# Altium PCB Flow_Pump显示板.PcbDoc
Units mil, origin at the board's own origin, x right, y up, seen from the top; angles counter-clockwise.
Board outline 3740.47 x 3740.47 mil, 2 copper layers (Top Layer, Bottom Layer); 39 components, 34 nets, 136 pads, 147 vias.
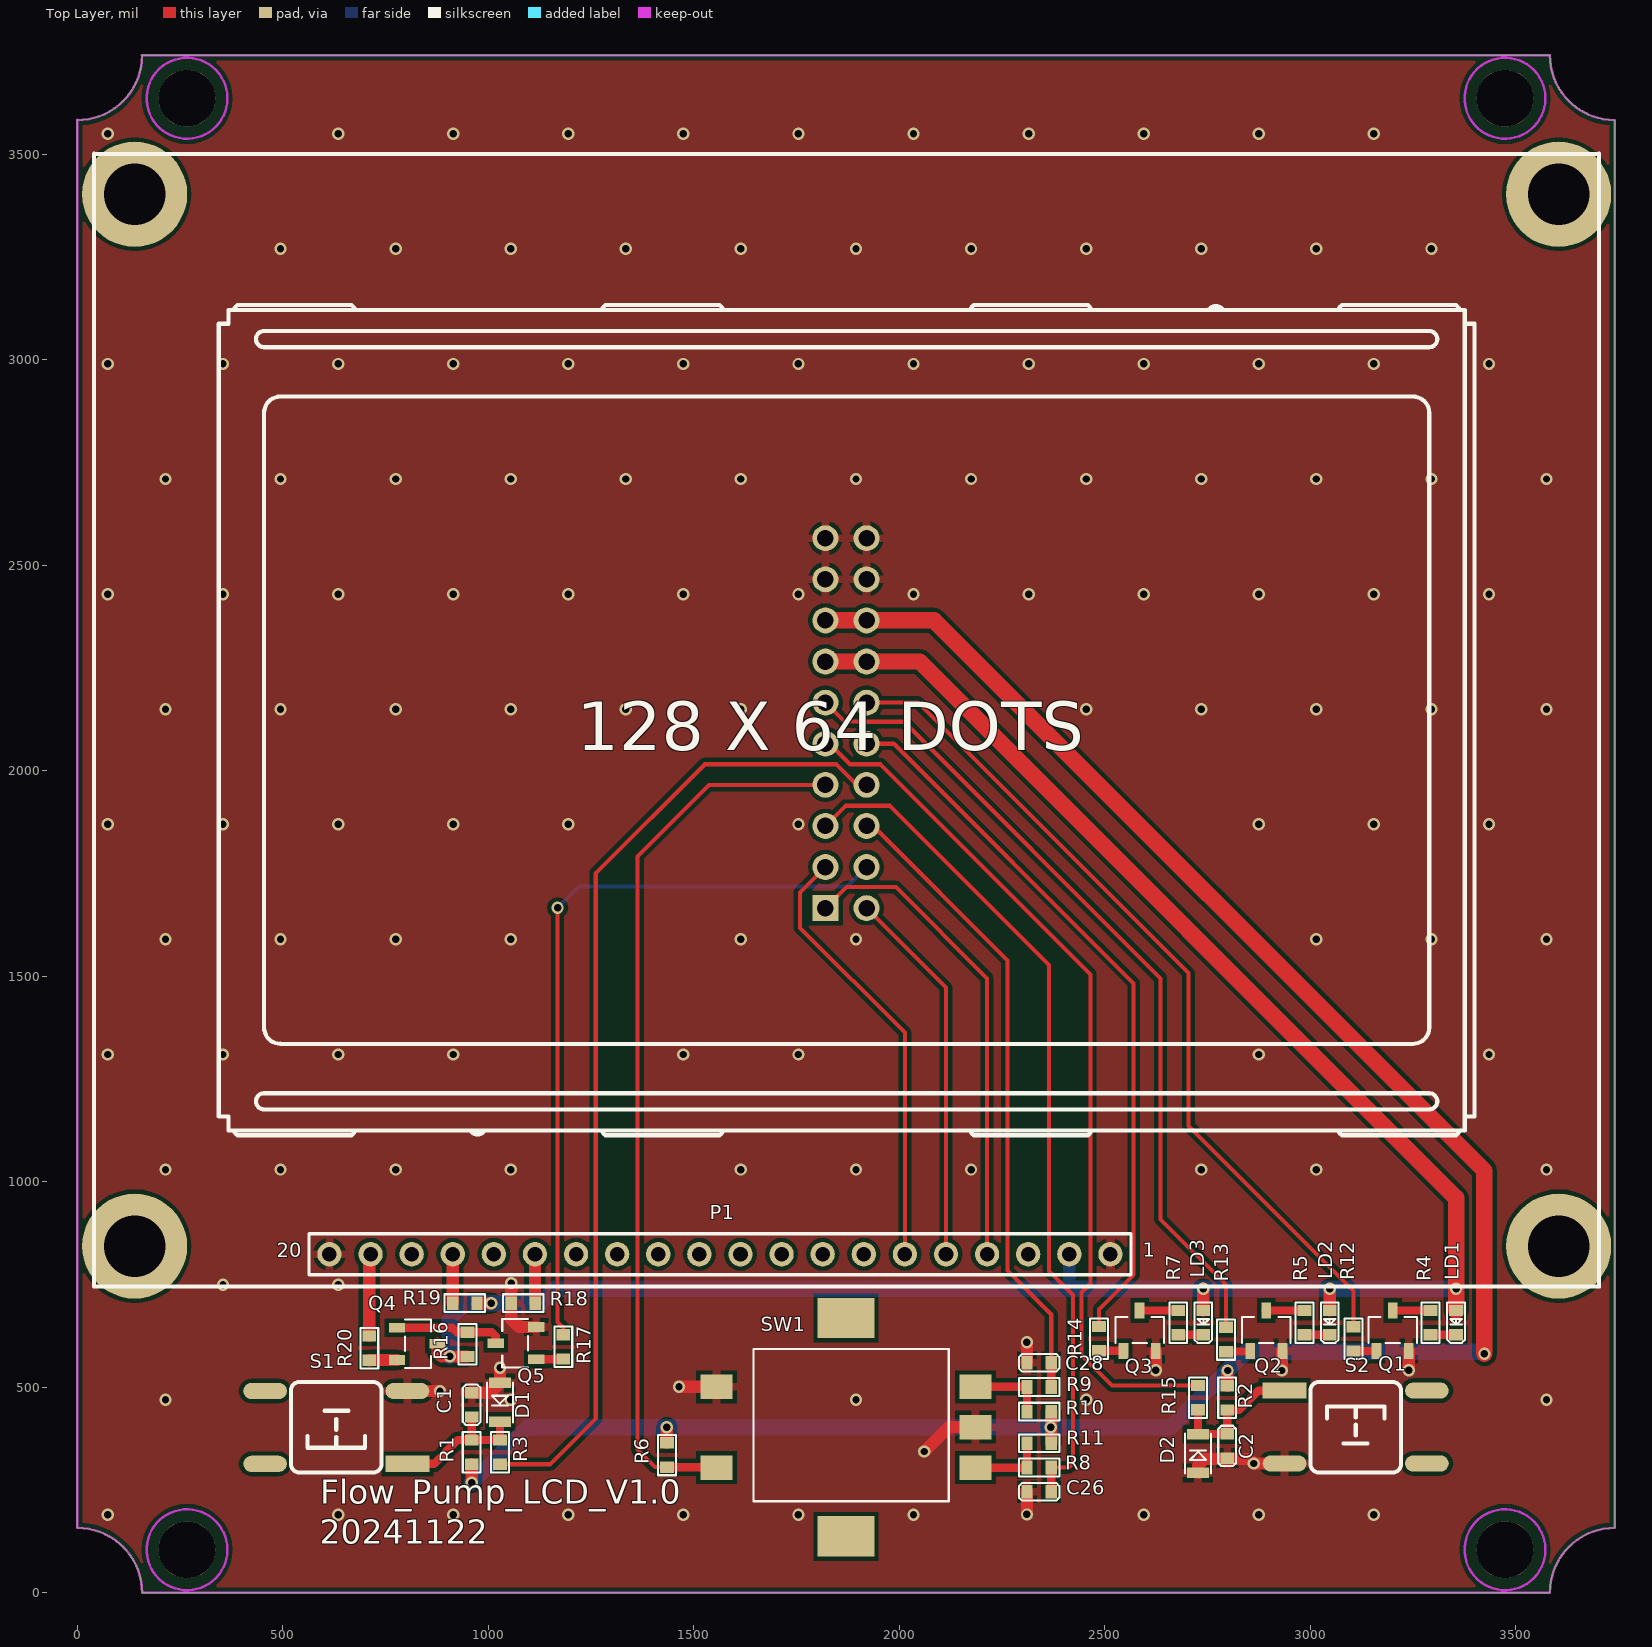
[diagram p0: Top Layer view]
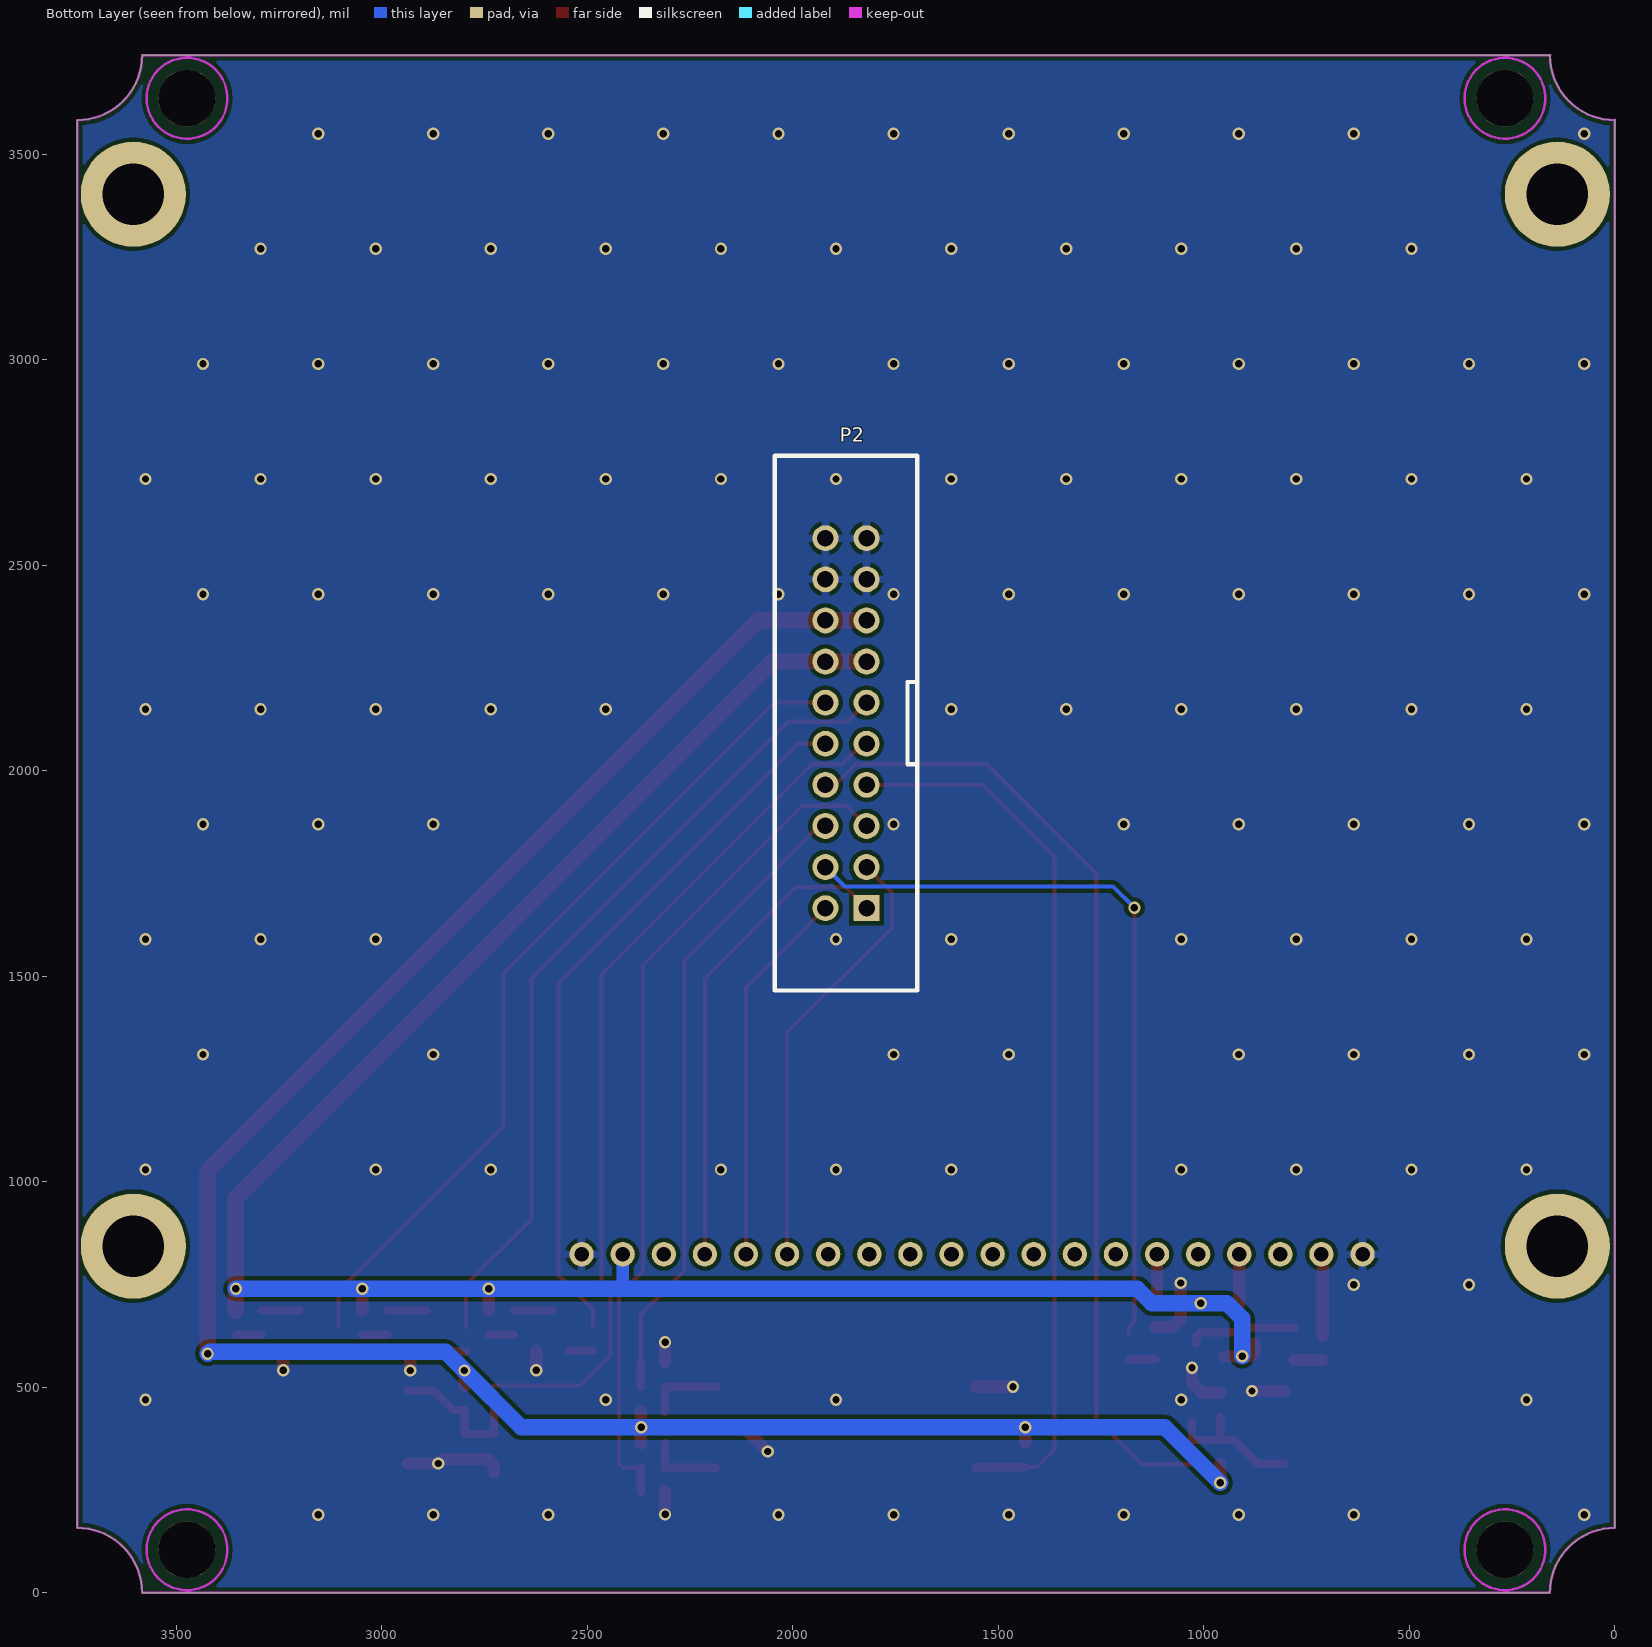
[diagram p1: Bottom Layer view, seen from below]

## Layer stack, top to bottom
Top Solder: solder mask 0.4, Solder Resist, Dk 3.5
Top Layer: signal copper 1.4
Dielectric 1: dielectric 12.6, FR-4, Dk 4.8
Bottom Layer: signal copper 1.4
Bottom Solder: solder mask 0.4, Solder Resist, Dk 3.5

## Board outline
0,157.32 0,3583.16 -0.16,3582.52 ccw(c-0.16,3740) 157.32,3740 157,3740.16 3582.68,3740.16 3582.52,3740.32 ccw(c3740,3740.32) 3740,3582.83 3740,157.64 3740.32,157.64 ccw(c3740.32,0.16) 3582.83,0.16 3582.83,0 157.64,0 157.64,-0.16 ccw(c0.16,-0.16)

## Design rules (kind name [scope] priority, off if disabled: settings)
Clearance [All] p1: gap=10
HoleSize [All] p1: absolutevalues=TRUE maxlimit=200 minlimit=1 maxpercent=80.000 minpercent=20.000
PolygonConnect PolygonConnect_1 [IsVia] p1: connectstyle=Direct reliefconductorwidth=10 reliefentries=4 polygonreliefangle="90 Angle" airgapwidth=10
PolygonConnect [All] p2: connectstyle=Relief reliefconductorwidth=20 reliefentries=4 polygonreliefangle="90 Angle" airgapwidth=10
RoutingVias [All] p1: holewidth=28 width=50 viastyle="Through Hole" minholewidth=28 minwidth=50 maxholewidth=28 maxwidth=50
SolderMaskExpansion [All] p1: expansion=4
Width [All] p1: maxlimit=150 minlimit=10 preferedwidth=10
29 further rules are at their usual default settings.

## Components (designator, comment, footprint, x,y, rotation, side; value= is the part's Value field where it differs from the comment)
C1 "1uF/25V" 0603C 959.37,486.37 r270 top
C2 "1uF/25V" 0603C 2797.37,327.32 r90 top
C26 "10nF" 0603C 2310.32,245.37 r0 top
C28 "10nF" 0603C 2369.37,559.37 r180 top
D1 "CESDB5V0D3" SOD323 1028.37,510.37 r270 top
D2 "CESDB5V0D3" SOD323 2726.37,291.37 r90 top
LD1 "LED_Green_19-217" 0603LED 3354.37,686.37 r270 top
LD2 "LED_Green_19-217" 0603LED 3046.87,686.37 r270 top
LD3 "LED_Green_19-217" 0603LED 2739.37,686.37 r270 top
P1 "LCD12864" LCD12864 1555.97,981.07 r0 top locked
P2 "Header 10X2" DC-2.54-L-Z-20P 1870.08,2115.37 r90 bottom
Q1 "MMBT3904" SOT23-3 3160.63,587.94 r270 top
Q2 "MMBT3904" SOT23-3 2853.37,587.94 r270 top
Q3 "MMBT3904" SOT23-3 2545,587.94 r270 top
Q4 "SI2306" SOT23-3 777.94,644.74 r180 top
Q5 "MMBT3904" SOT23-3 1116.37,567.63 r0 top
R1 "10K" 0603R 959.37,312.32 r90 top
R2 "10K" 0603R 2797.37,503.37 r270 top
R3 "100" 0603R 1028.37,312.32 r90 top
R4 "1K" 0603R 3292.37,627.31 r90 top
R5 "1K" 0603R 2985.37,627.32 r90 top
R6 "4.7K" 0603R 1434.37,364.37 r270 top
R7 "1K" 0603R 2678.37,627.31 r90 top
R8 "10K" 0603R 2369.37,304.37 r180 top
R9 "10K" 0603R 2369.37,500.37 r180 top
R10 "10K" 0603R 2310.32,440.37 r0 top
R11 "10K" 0603R 2310.32,363.37 r0 top
R12 "1K" 0603R 3104.8,647 r270 top
R13 "1K" 0603R 2794.37,645.37 r270 top
R14 "1K" 0603R 2485.37,647.37 r270 top
R15 "100" 0603R 2726.37,503.91 r270 top
R16 "10K" 0603R 949.37,633.43 r270 top
R17 "1K" 0603R 1182.37,627.43 r270 top
R18 "0R" 0603R 1055.32,704.37 r0 top
R19 "10K" 0603R 972.43,704.37 r180 top
R20 "0R" 0603R 710.37,565.37 r90 top
S1 "SW-PB" "TSW SMD-6*6*8" 629.92,402.44 r180 top locked
S2 "SW-PB" "TSW SMD-6*6*8" 3110.24,402.44 r0 top locked
SW1 "RE1103" EX1103S-D2-10 1870.08,402.44 r90 top locked

## Footprints (in the part's own frame and the unit in brackets; to place one, negate y for a bottom-side part, rotate by r counter-clockwise, add the part's x,y. Pads: shape width x height; smd on the part's side, far side on the other; paste and mask are expansions set on the pad)
0603C [mm]
  rect 0.7x0.85 smd: 1(0,0) 2(1.5,0)
  silkscreen extent -0.5,-0.55 2,0.55
0603LED [mm]
  rect 0.7x0.85 smd: 1(0,0) 2(1.5,0)
  silkscreen extent -0.5,-0.55 2,0.55
0603R [mm]
  rect 0.7x0.85 smd: 1(0,0) 2(1.5,0)
  silkscreen extent -0.5,-0.55 2,0.55
DC-2.54-L-Z-20P [mm] "立式直插简牛插座，间距2.54"
  rect 1.6x1.6 hole 1.02: 1(-11.43,-1.27)
  round 1.6 hole 1.02: 2(-11.43,1.27) 3(-8.89,-1.27) 4(-8.89,1.27) 5(-6.35,-1.27) 6(-6.35,1.27) 7(-3.81,-1.27) 8(-3.81,1.27) 9(-1.27,-1.27) 10(-1.27,1.27) 11(1.27,-1.27) 12(1.27,1.27) 13(3.81,-1.27) 14(3.81,1.27) 15(6.35,-1.27) 16(6.35,1.27) 17(8.89,-1.27) 18(8.89,1.27) 19(11.43,-1.27) 20(11.43,1.27)
  silkscreen extent -16.53,-4.4 16.53,4.4, body extent -16.53,-4.4 16.53,4.7, height 8.8
EX1103S-D2-10 [mm]
  rect 1.5x2 smd: A(-2.5,-8) B(2.5,-8) C(0,-8) D(-2.5,8) E(2.5,8)
  rect 2.5x3.5 smd: A3(6.75,0) A4(-6.75,0)
  silkscreen extent -4.57,-6.35 4.83,5.71
LCD12864 [mm] "Connector; Header; 5 Position"
  round 6.5 hole 3.8: 0(-35.982,-3.505) 0(-35.982,61.495) 0(52.018,-3.505) 0(52.018,61.495)
  round 1.5 hole 0.9: 1(24.318,-4.006) 2(21.778,-4.006) 3(19.238,-4.006) 4(16.698,-4.006) 5(14.158,-4.006) 6(11.618,-4.006) 7(9.078,-4.006) 8(6.538,-4.006) 9(3.998,-4.006) 10(1.458,-4.006) 11(-1.082,-4.006) 12(-3.622,-4.006) 13(-6.162,-4.006) 14(-8.702,-4.006) 15(-11.242,-4.006) 16(-13.782,-4.006) 17(-16.322,-4.006) 18(-18.862,-4.006) 19(-21.402,-4.006) 20(-23.942,-4.006)
  silkscreen extent -38.48,-6.01 54.52,64
SOD323 [mm]
  rect 0.65x1.35 smd: 1(0,0) 2(2.4,0)
  silkscreen extent -0.03,-0.8 2.44,0.8
SOT23-3 [mm]
  rect 1x0.6 smd: 1(0,0) 2(0,2) 3(-2.5,1)
  silkscreen extent -2.1,-0.5 -0.5,2.5
"TSW SMD-6*6*8" [mm] "6*6*8mm"
  rect 2.7x1 smd: 1(-4.4,2.261)
  oval 2.7x1 smd: 2(-4.4,-2.239) 3(4.4,-2.239) 4(4.4,2.261)
  silkscreen extent -2.79,-2.79 2.79,2.79, body extent -4.5,-3 4.5,3, height 7.95

## Part data
C1 C2: library part CAP
C26 C28: library part CAP, "Capacitor"
D1 D2: library part "DIODE S"
P1: library part "Header 20", "Header, 20-Pin"
P2: "Header, 10-Pin, Dual row"
Q1 Q2 Q3 Q5: library part NPN_MMBT3904
Q4: library part BUK92150-55A, "BUK92150-55A"
R1 R2 R3 R4 R5 R7 R12 R13 R14 R15 R17 R18 R19 R20: library part RES0603
R6 R8 R9 R10 R11: library part RES2
R16: library part Res2, "Resistor"
S1 S2: "Switch"

## Free pads (board coordinates)
  round 137.8 hole 137.8 unplated: 0(266.79,104.41) 0(266.79,3635.75) 0(3473.37,104.41) 0(3473.37,3635.75)

## Via types
v1: diameter 30, hole 18, Top Layer to Bottom Layer, tented both sides, 147 vias

## Nets (pads, with @x,y where several pads share a name; then routed paths per layer and width w, separated by ;. In a path a pad name is that pad's centre, name@x,y a point inside that pad or via, vN(x,y) a via of type N, cw(c..) or ccw(c..) an arc to the next point about the centre after c; other vN are vias at no path point)
3.3V_ISO: P2.15 P2.16 R1.1 R2.1 R6.1 R10.2 R11.2 | length 5398.5
  Top Layer w30: v1(959.37,267.37) R1.1 ; R6.1 v1(1434.37,402.37) ; R11.2 R10.2 ; R2.1 2797.37,539.37 v1(2798.37,540.37)
  Top Layer w40: P2.15 P2.16 2084.37,2365.37 3423.37,1026.37 v1(3423.37,581.37)
  Bottom Layer w40: v1(959.37,267.37) 1094.37,402.37 v1(1434.37,402.37) v1(2368.37,402.37) 2660.37,402.37 v1(2798.37,540.37) 2844.37,586.37 3418.37,586.37 v1(3423.37,581.37)
FAULT: P2.12 R12.1 | length 2082.5
  Top Layer w10: P2.12 2045.37,2165.37 2703.37,1507.37 2703.37,1135.37 3104.8,733.94 R12.1
GND: C1.1 C2.1 C26.1 C28.2 D1.1 D2.1 P1.1 P1.20 P2.17 P2.18 P2.19 P2.20 Q1.2 Q2.2 Q3.2 Q5.2 R18.1 S1.2 S2.2 SW1.C SW1.E | length 1078.1
  Top Layer w30: S1.2 v1(882.37,490.61) ; C1.1 1004.37,486.37 D1.1 v1(1028.37,547.37) ; v1(1055.32,753.43) R18.1 1055.32,665.43 1074.37,646.37 Q5.2 ; v1(1463.87,500.87) SW1.E ; v1(2060.37,343.37) 2119.44,402.44 SW1.C ; v1(2310.32,190.32) C26.1 ; C28.2 v1(2310.32,609.43) ; v1(2623.74,540.74) Q3.2 ; D2.1 2726.37,309.37 2742.37,325.37 2851.32,325.37 v1(2862.41,314.27) S2.2 ; v1(2930.37,540.37) 2930.37,586.2 Q2.2@2931.11,586.94 ; v1(3239.37,541.37) Q1.2
  other v1: 74.37,189.37 634.37,189.37 914.37,189.37 1194.37,189.37 1474.37,189.37 1754.37,189.37 2034.37,189.37 2594.37,189.37 2874.37,189.37 3154.37,189.37 214.37,469.37 1054.37,469.37 1894.37,469.37 2454.37,469.37 3574.37,469.37 354.37,749.37 634.37,749.37 214.37,1029.37 494.37,1029.37 774.37,1029.37 1054.37,1029.37 1614.37,1029.37 1894.37,1029.37 2174.37,1029.37 2734.37,1029.37 3014.37,1029.37 3574.37,1029.37 74.37,1309.37 354.37,1309.37 634.37,1309.37 914.37,1309.37 1474.37,1309.37 1754.37,1309.37 2874.37,1309.37 3434.37,1309.37 214.37,1589.37 494.37,1589.37 774.37,1589.37 1054.37,1589.37 1614.37,1589.37 1894.37,1589.37 3014.37,1589.37 3294.37,1589.37 3574.37,1589.37 74.37,1869.37 354.37,1869.37 634.37,1869.37 914.37,1869.37 1194.37,1869.37 1754.37,1869.37 2874.37,1869.37 3154.37,1869.37 3434.37,1869.37 214.37,2149.37 494.37,2149.37 774.37,2149.37 1054.37,2149.37 1334.37,2149.37 1614.37,2149.37 2454.37,2149.37 2734.37,2149.37 3014.37,2149.37 3294.37,2149.37 3574.37,2149.37 74.37,2429.37 354.37,2429.37 634.37,2429.37 914.37,2429.37 1194.37,2429.37 1474.37,2429.37 1754.37,2429.37 2034.37,2429.37 2314.37,2429.37 2594.37,2429.37 2874.37,2429.37 3154.37,2429.37 3434.37,2429.37 214.37,2709.37 494.37,2709.37 774.37,2709.37 1054.37,2709.37 1334.37,2709.37 1614.37,2709.37 1894.37,2709.37 2174.37,2709.37 2454.37,2709.37 2734.37,2709.37 3014.37,2709.37 3294.37,2709.37 3574.37,2709.37 74.37,2989.37 354.37,2989.37 634.37,2989.37 914.37,2989.37 1194.37,2989.37 1474.37,2989.37 1754.37,2989.37 2034.37,2989.37 2314.37,2989.37 2594.37,2989.37 2874.37,2989.37 3154.37,2989.37 3434.37,2989.37 494.37,3269.37 774.37,3269.37 1054.37,3269.37 1334.37,3269.37 1614.37,3269.37 1894.37,3269.37 2174.37,3269.37 2454.37,3269.37 2734.37,3269.37 3014.37,3269.37 3294.37,3269.37 74.37,3549.37 634.37,3549.37 914.37,3549.37 1194.37,3549.37 1474.37,3549.37 1754.37,3549.37 2034.37,3549.37 2314.37,3549.37 2594.37,3549.37 2874.37,3549.37 3154.37,3549.37
KEYA: C26.2 P2.5 R8.1 | length 2078.1
  Top Layer w10: P2.5 1869.08,1914.37 1977.37,1914.37 2364.37,1527.37 2364.37,782.37 2422.37,724.37 2422.37,314.37 2412.37,304.37 R8.1
  Top Layer w20: C26.2 R8.1
KEYB: C28.1 P2.6 R9.1 | length 1560.6
  Top Layer w10: P2.6 1936.37,1865.37 2263.37,1538.37 2263.37,783.37 2369.37,677.37 C28.1
  Top Layer w20: R9.1 C28.1
KEYSW: P2.7 R6.2 SW1.D | length 2183.9
  Top Layer w10: R6.2 1405.43,305.32 1362.37,348.37 1362.37,1791.37 1536.37,1965.37 P2.7
  Top Layer w20: R6.2 1553.82,305.32 SW1.D
LCD_BKL: P2.4 R17.1 | length 1837.5
  Top Layer w10: v1(1168.37,1666.37) 1168.37,658.37 1182.37,644.37 R17.1
  Bottom Layer w10: v1(1168.37,1666.37) 1220.37,1718.37 1873.08,1718.37 P2.4
LCD_CLK: P1.6 P2.3 | length 1073.2
  Top Layer w10: P2.3 1758.37,1703.66 1758.37,1617.37 2013.37,1362.37 P1.6
LCD_CS: P1.4 P2.1 | length 1177.4
  Top Layer w10: P2.1 1871.08,1716.37 1991.37,1716.37 2213.37,1494.37 P1.4
LCD_SID: P1.5 P2.2 | length 922.1
  Top Layer w10: P2.2 2113.37,1472.08 P1.5
NetC1_2: C1.2 D1.2 R1.2 R3.2 S1.1 | length 349.7
  Top Layer w20: S1.1 867.44,313.44 925.37,371.37 R1.2 ; C1.2 R1.2 ; D1.2 R3.2 R1.2
NetC2_2: C2.2 D2.2 R2.2 R15.2 S2.1 | length 347.3
  Top Layer w20: R15.2 D2.2 2796.86,385.86 C2.2 R2.2 2826.32,444.32 2873.44,491.44 S2.1
NetLD1_2: LD1.2 R4.1 | length 62
  Top Layer w20: R4.1 LD1.2
NetLD2_2: LD2.2 R5.1 | length 62.5
  Top Layer w20: R5.1@2984.37,627.31 LD2.2
NetLD3_2: LD3.2 R7.1 | length 61
  Top Layer w20: R7.1 LD3.2
NetP1_15: P1.15 R18.2 | length 119.4
  Top Layer w30: P1.15 1113.37,705.37 R18.2
NetP1_17: P1.17 R19.2 | length 119
  Top Layer w30: R19.2 P1.17
NetP1_19: P1.19 R20.2 | length 200.2
  Top Layer w30: R20.2 710.37,820.37 P1.19
NetQ1_1: Q1.1 R12.2 | length 56.4
  Top Layer w20: R12.2@3104.37,588.37 R12.2 Q1.1
NetQ1_3: Q1.3 R4.2 | length 93.8
  Top Layer w20: Q1.3 Q1.3@3201.37,686.37 ; Q1.3@3200.37,687.37 Q1.3@3201.37,686.37 ; R4.2 Q1.3@3201.37,686.37
NetQ2_1: Q2.1 R13.2 | length 58.3
  Top Layer w20: R13.2 2795,586.94 Q2.1@2852.37,586.94
NetQ2_3: Q2.3 R5.2 | length 93.6
  Top Layer w20: Q2.3@2891.37,685.74 2891.74,685.37 Q2.3 R5.2@2984.37,686.37
NetQ3_1: Q3.1 R14.2 | length 60.3
  Top Layer w20: R14.2@2485.74,587.94 R14.2 2544.63,588.32 Q3.1
NetQ3_3: Q3.3 R7.2 | length 94
  Top Layer w20: Q3.3 R7.2
NetQ4_1: Q4.1 Q5.3 R16.1 | length 265.5
  Top Layer w20: Q4.1 912,644.74 923.32,633.43 R16.1 1008.32,633.43 1017.94,623.8 Q5.3
NetQ5_1: Q5.1 R17.2 | length 66.3
  Top Layer w20: Q5.1 1181.63,567.63 R17.2
NetR8_2: R8.2 R11.1 SW1.A | length 184.4
  Top Layer w20: SW1.A 2309.96,304.02 R8.2 R11.1
NetR9_2: R9.2 R10.1 SW1.B | length 185.5
  Top Layer w20: SW1.B 2309.82,500.87 R9.2 R10.1
RUN: P2.10 R14.1 | length 1760.6
  Top Layer w10: P2.10 1986.37,2065.37 2569.37,1482.37 2569.37,773.37 2485.37,689.37 R14.1
SW1: P2.8 R3.1 | length 2395.2
  Top Layer w10: R3.1 1150.32,312.32 1261.37,423.37 1261.37,1750.37 1526.37,2015.37 1847.37,2015.37 1897.37,1965.37 P2.8
SW2: P2.9 R15.1 | length 2127.2
  Top Layer w10: P2.9 1830.37,2065.37 1880.37,2015.37 1954.37,2015.37 2465.37,1504.37 2465.37,752.37 2443.37,730.37 2443.37,577.37 2516.83,503.91 R15.1
VCC_5V: LD1.1 LD2.1 LD3.1 P1.2 P2.13 P2.14 Q4.3 R16.2 R19.1 | length 5241.8
  Top Layer w30: Q4.3 876.37,584.37 886.37,574.37 R16.2 ; R19.1 v1(1007.37,704.37) ; LD3.1 v1(2739.37,739.37) ; LD2.1 v1(3046.87,739.37)
  Top Layer w40: P2.13 P2.14 2049.37,2265.37 3354.37,960.37 v1(3354.37,739.37) LD1.1
  Bottom Layer w30: 2413.37,739.37 P1.2
  Bottom Layer w40: v1(906.37,575.37) 906.37,667.37 943.37,704.37 v1(1007.37,704.37) 1126.37,704.37 1161.37,739.37 2413.37,739.37 v1(2739.37,739.37) v1(3046.87,739.37) v1(3354.37,739.37)
VCC_5V_LCD: Q4.2 R20.1 | length 67.8
  Top Layer w30: R20.1 711,566 Q4.2
WARN: P2.11 R13.1 | length 2008.1
  Top Layer w10: P2.11 1866.08,2119.37 1900.32,2119.37 1900.82,2118.87 2010.87,2118.87 2635.37,1494.37 2635.37,908.37 2794.37,749.37 R13.1
pads on no net: P1.0 P1.3 P1.7 P1.8 P1.9 P1.10 P1.11 P1.12 P1.13 P1.14 P1.16 P1.18 S1.3 S1.4 S2.3 S2.4 SW1.A3 SW1.A4

## Polygon pours and split planes (outlines as drawn)
GND on Top Layer "Top Layer-No Net" (solid, remove dead copper, pour order 2): 0,0 0,3740.16 3740.16,3740.16 3740.16,0
GND on Bottom Layer "Top Layer-No Net1" (solid, remove dead copper, pour order 3): 0,0 0,3740.16 3740.16,3740.16 3740.16,0

## Keep-outs
Keep-Out Layer:
  circle w6: c266.79,3635.75 r98.43
  circle w6: c3473.37,3635.75 r98.43
  circle w6: c3473.37,104.41 r98.43
  circle w6: c266.79,104.41 r98.43
  lines w6: 0,157.32 0,3583.16 -0.16,3582.52 ccw(c-0.16,3740) 157.32,3740 157,3740.16 3582.68,3740.16 3582.52,3740.32 ccw(c3740,3740.32) 3740,3582.83 3740,157.64 3740.32,157.64 ccw(c3740.32,0.16) 3582.83,0.16 3582.83,0 157.64,0 157.64,-0.16 ccw(c0.16,-0.16) 0.16,157.32

## Silkscreen, mask and mechanical layers (free items; w line width, h text height)
Top Overlay:
  text "Flow_Pump_LCD_V1.0" at 590.37,197.37 h100
  text "20241122" at 589.37,99.37 h100
Mechanical 1:
  lines w6: -0.16,3582.52 ccw(c-0.16,3740) 157.32,3740 ; 0,157.32 0,3583.16 ; 0.16,157.32 cw(c0.16,-0.16) 157.64,-0.16 ; 157,3740.16 3582.68,3740.16 ; 157.64,0 3582.83,0 ; 3582.52,3740.32 ccw(c3740,3740.32) 3740,3582.83 3740,157.64 ; 3582.83,0.16 cw(c3740.32,0.16) 3740.32,157.64

## Text inside footprints (layer, text, board x,y; h text height)
P1: Top Overlay "20" at 484.57,804.07 h60; Top Overlay "1" at 2592.27,805.47 h60; Top Overlay "128 X 64 DOTS" at 1214.45,2049.05 h118.11